# Allegro board C209.brd
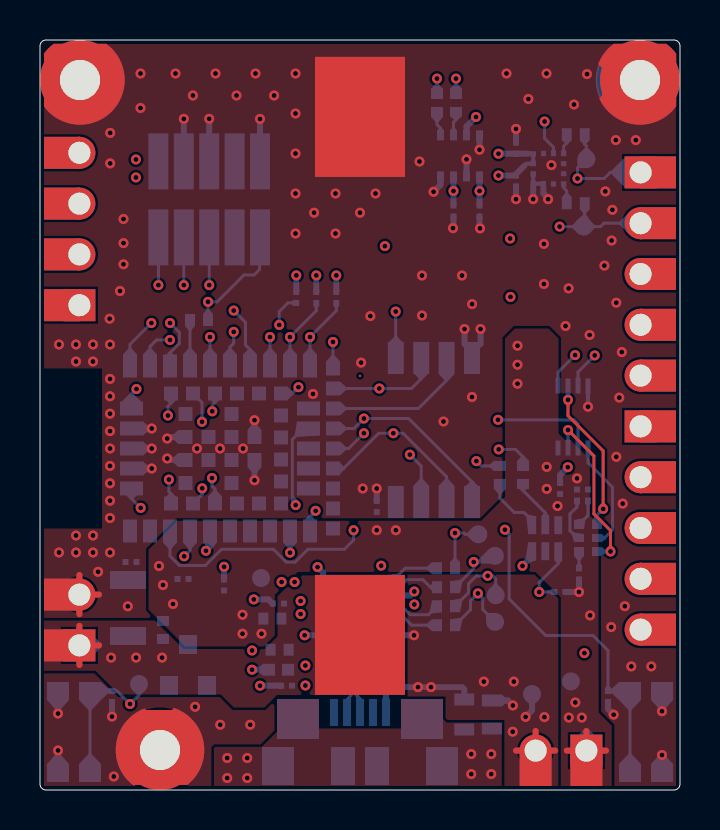
[diagram p0: board, top side]
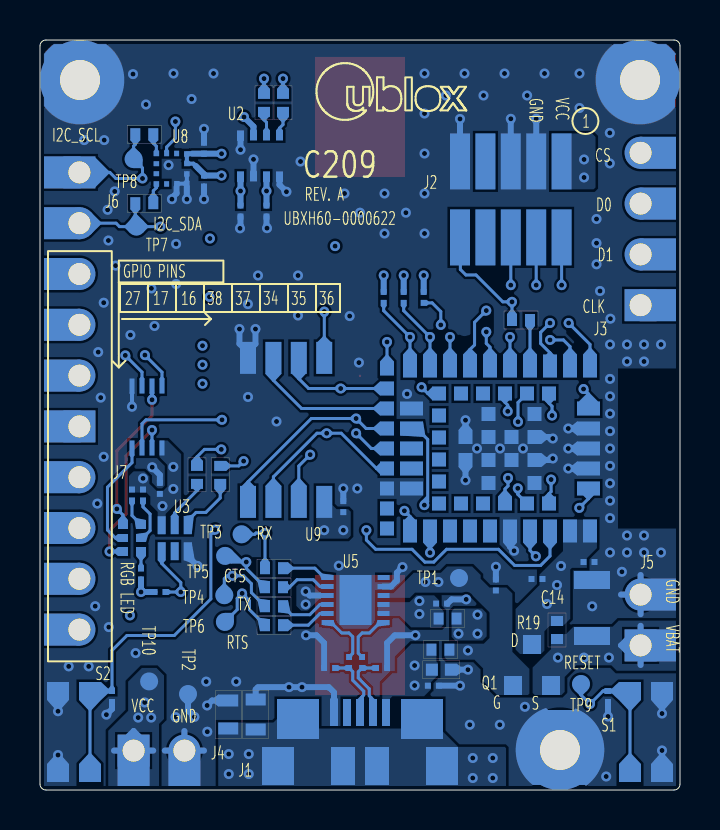
[diagram p1: board, bottom side, seen from below]

Outline 32 x 37.5 mm; copper layers: TOP, L2, L3, BOTTOM. Coordinates in mm from the lower left corner of the outline.
Outline path: 0,37.2 arc(0.09,37.41) 0.3,37.5 31.7,37.5 arc(31.91,37.41) 32,37.2 32,0.3 arc(31.91,0.09) 31.7,0 0.3,0 arc(0.09,0.09) 0,0.3 0,37.2

## Placement (name value [footprint] x y rotation side)
A1  -  [SUBLOX_NINA_LGA55_1000X1500]  15.3 12.07 180 bottom
BAT1  -  [TKEYSTONE_CR2032_3003_PLAST1]  16 20.7 90 top
C1  100N  [S0603_C]  21.21 3.77 270 bottom
C2  100N  [S0201_C]  12.33 5.21 180 bottom
C3  47P  [S0201_C]  14.92 6.1 0 bottom
C4  4U7  [S0402_C_MURATA07]  11.93 6.01 180 bottom
C5  47P  [S0201_C]  17.52 6.1 180 bottom
C6  100N  [S0201_C]  3.6 4.67 90 bottom
C7  100N  [S0201_C]  28.4 4.67 90 bottom
C8  100N  [S0201_C]  11.92 9.32 0 bottom
C9  100N  [S0201_C]  23.8 32.09 270 bottom
C10  100N  [S0201_C]  23.8 30.45 90 bottom
C11  100N  [S0201_C]  4.55 11.4 0 bottom
C12  100N  [S0201_C]  7.15 10.55 180 bottom
C13  100N  [S0201_C]  16.84 14.17 270 bottom
C14  4U7  [S1206_C]  4.4 9.1 270 bottom
C17  100N  [S0201_C]  21.97 28.95 90 bottom
C18  100N  [S0201_C]  20.68 28.95 90 bottom
C19  1U0  [S0201_C]  26 15.08 270 bottom
DS1  RGB  [S1510]  27.4 12.6 0 bottom
J1  -  [SHIROSE_ZX62R_B_5]  16 1.2 180 bottom
J2  -  [SCON_SAMTEC_50MIL_2X5]  7.82 29.53 0 bottom
J3  -  [TCONSIL100MIL4]  1.97 28.05 90 bottom
J4  -  [TCONSIL100MIL2]  26.05 1.97 180 bottom
J5  -  [TCONSIL100MIL2]  1.97 8.5 90 bottom
J6  -  [TCONSIL100MIL5]  30.03 25.8 270 bottom
J7  -  [TCONSIL100MIL5]  30.03 13.1 270 bottom
NOREF  -  []  26.9 17.1 0 top
NOREF#2  -  []  13.5 12.95 90 top
NOREF#3  -  []  12.2 -1.15 90 top
NOREF#4  -  []  26.42 30.06 90 top
NOREF#5  -  []  23.2 17.75 90 top
NOREF#6  -  []  12.75 -1.55 0 top
NOREF#7  -  []  14.55 0.15 0 top
NOREF#8  -  []  13.5 12.95 90 top
NOREF#9  -  []  14.72 8 90 top
NOREF#10  -  [unnamed#2]  6 2 0 top
NOREF#11  -  []  14.52 10.57 0 top
NOREF#12  -  [unnamed#2]  2 35.5 0 top
NOREF#13  -  []  4.57 19.07 0 top
NOREF#14  -  []  13.25 -0.25 90 top
NOREF#15  -  []  14.7 3.87 0 top
NOREF#16  -  []  15.75 0.15 0 top
NOREF#17  -  []  20.1 1.2 90 top
NOREF#18  -  []  11.75 2.55 90 top
NOREF#19  -  []  14.72 8 0 top
NOREF#20  -  []  23.2 19.85 0 top
NOREF#21  -  []  0.3 0 90 top
NOREF#22  -  []  12.7 0.15 0 top
NOREF#23  -  []  27.4 17.1 90 top
NOREF#24  -  []  15.3 12.07 90 top
NOREF#25  -  []  13.95 4.65 0 top
NOREF#26  -  []  14.72 8.43 0 top
NOREF#27  -  []  11.85 4.65 0 top
NOREF#28  -  [unnamed#2]  30 35.5 0 top
NOREF#29  -  []  11.15 5.66 0 top
NOREF#30  -  []  12.05 14.32 0 top
NOREF#31  -  []  11.83 4.46 90 top
NOREF#32  -  []  0.3 22.08 0 top
NOREF#33  -  []  17.55 0.25 90 top
NOREF#34  -  []  16.22 8.25 90 top
NOREF#35  -  []  14.5 4.65 0 top
NOREF#36  -  []  27.9 13.35 0 top
NOREF#37  -  []  11.1 5.71 90 top
NOREF#38  -  []  4.5 12.95 0 top
NOREF#39  -  []  11 0.25 90 top
NOREF#40  -  []  11.45 6.01 0 top
NOREF#41  -  []  14.92 8.25 90 top
NOREF#42  -  []  24.66 30.31 90 top
NOREF#43  -  []  12.2 -1.2 0 top
NOREF#44  -  []  7.27 16.5 0 top
NOREF#45  -  []  25.17 31.83 0 top
NOREF#46  -  []  11.83 4.46 0 top
NOREF#47  -  []  0 0.3 0 top
NOREF#48  -  []  15.04 8.38 90 top
Q1  -  [SSOT23]  7.4 6.25 180 bottom
R1  0R  [S0402_R]  11.98 7.01 180 bottom
R2  27R  [S0201_R]  15.89 6.38 90 bottom
R3  27R  [S0201_R]  16.54 6.38 90 bottom
R4  0R  [S0402_R]  11.62 8.57 180 bottom
R5  0R  [S0402_R]  20.3 11.09 0 bottom
R6  0R  [S0402_R]  20.3 9.19 0 bottom
R7  0R  [S0402_R]  20.3 10.14 0 bottom
R8  0R  [S0402_R]  20.3 8.24 0 bottom
R9  1K0  [S0201_R]  26.95 10.8 270 bottom
R10  1K0  [S0201_R]  26.85 14.75 90 bottom
R11  2K7  [S0201_R]  27.4 14.75 90 bottom
R12  0R  [S0402_R]  26.79 32.79 0 bottom
R13  0R  [S0402_R]  26.79 29.34 0 bottom
R14  0R  [S0402_R]  20.8 34.35 90 bottom
R15  0R  [S0402_R]  19.85 34.35 90 bottom
R16  0R  [S0402_R]  7.95 23.5 0 bottom
R17  10M  [S0603_R]  22.59 3.77 90 bottom
R18  10K  [S0201_R]  9.2 10.25 270 bottom
R19  0R  [S0402_R]  6.15 8 90 bottom
R20  10K  [S0201_R]  26 9.9 0 bottom
R22  0R  [S0402_R]  22.99 15.75 90 bottom
R23  0R  [S0402_R]  24.15 15.75 90 bottom
R24  4K7  [S0201_R]  14.81 24.63 90 bottom
R25  10K  [S0201_R]  12.81 24.63 270 bottom
R26  4K7  [S0201_R]  13.81 24.63 90 bottom
S1  -  [TCT_SW]  1.7 2.9 270 bottom
S2  -  [TCT_SW]  30.3 2.9 90 bottom
TP1  -  [STP_900]  11.05 10.6 180 bottom
TP2  -  [STP_900]  24.6 4.8 180 bottom
TP3  -  [STP_900]  21.92 12.79 180 bottom
TP4  -  [STP_900]  22.79 9.74 180 bottom
TP5  -  [STP_900]  22.75 11.71 180 bottom
TP6  -  [STP_900]  22.75 8.4 180 bottom
TP7  -  [STP_900]  27.18 28.17 180 bottom
TP8  -  [STP_900]  27.32 31.55 180 bottom
TP9  -  [STP_900]  4.95 5.3 180 bottom
TP10  -  [STP_900]  26.54 5.43 180 bottom
U2  -  [BME280_2500X2500_8P]  21 31.7 90 bottom
U3  -  [APDS-9306_2000X2000X700_12P]  25.26 12.59 180 bottom
U5  -  [SDFN_12_FTDI]  16.22 9.5 0 bottom
U6  -  [SVSSOP8]  26.65 18.65 270 bottom
U8  -  [ST_LGA_2000X2000X700_12P]  25.42 31.06 180 bottom
U9  -  [SSOIC8_S2A]  19.7 18 270 bottom

## Library data of the parts
A1 = UBLOX_NINA_B3: part number: UBLOX_NINA_B3_DEFAULT-UBXH14-0000403
BAT1 = BATTERY_SMD1
C1 = CAP: User Part Number: S0603_C; part number: CAP_DEFAULT-UBXH01-2022001
C2 C6-C13 C17 C18 = CAP: User Part Number: S0402_C; part number: CAP_DEFAULT-UBXH01-0000245
C3 C5 = CAP: User Part Number: S0402_C; part number: CAP_DEFAULT-UBXH01-0001022
C4 = CAP: part number: CAP_DEFAULT-UBXH01-0000243
C14 = CAP: User Part Number: S1206_C; part number: CAP_DEFAULT-UBXH01-0000127
C19 = CAP: User Part Number: S0402_C; part number: CAP_DEFAULT-UBXH01-0000272
DS1 = SMLP36: part number: SMLP36_DEFAULT-UBXH11-0000019
J1 = CON_005: part number: CON_005_ADD6SGND-UBXH04-0000168
J2 = CON_010: User Part Number: TCONDIL100MIL72; part number: CON_010_DEFAULT-UBXH04-0000194
J3 = CON_004: part number: CON_004_DEFAULT-UBXH04-0000590
J4 J5 = CON_002: part number: CON_002_DEFAULT-UBXH04-0000587
J6 J7 = CON_005: part number: CON_005_DEFAULT-UBXH04-0005001
Q1 = P_CHANNEL_MOSFET: User Part Number: SSOT23; part number: P_CHANNEL_MOSFET_SOT23-UBXH20-0071001
R1 R4-R8 R12-R16 R19 R22 R23 = RES: User Part Number: S0402_R; part number: RES_DEFAULT-UBXH18-0003002
R2 R3 = RES: User Part Number: S0201_R; part number: RES_DEFAULT-UBXH18-0000470
R9 R10 = RES: User Part Number: S0201_R; part number: RES_DEFAULT-UBXH18-0000007
R11 = RES: User Part Number: S0201_R; part number: RES_DEFAULT-UBXH18-0000027
R17 = RES: User Part Number: S0603_R; part number: RES_DEFAULT-UBXH18-0007169
R18 R20 R25 = RES: User Part Number: S0201_R; part number: RES_DEFAULT-UBXH18-0001097
R24 R26 = RES: User Part Number: S0201_R; part number: RES_DEFAULT-UBXH18-0001089
S1 S2 = SW_ON_1POLA
TP1-TP10 = TESTPOINT: part number: TESTPOINT_DEFAULT-UBXH00-0000021
U2 = BME_280
U3 = APDS-9306
U5 = FTDI_FT234XD
U6 = NXP_74LVC3G07
U8 = ST_LGA
U9 = FLASH_SQI: part number: FLASH_SQI_SOIC8-UBXH13-0000073

## Footprints (pads in the part's own frame, mm; a bottom-side part is the same pattern mirrored in y, then rotated)
APDS-9306_2000X2000X700_12P
  rect 0.4x0.9 smd: 1(0.65,0.65) 2(0,0.65) 3(-0.65,0.65) 4(-0.65,-0.65) 5(0,-0.65) 6(0.65,-0.65)
BME280_2500X2500_8P
  rect 0.5x0.35 smd: 1(1.025,0.975) 2(1.025,0.325) 3(1.025,-0.325) 4(1.025,-0.975) 5(-1.025,-0.975) 6(-1.025,-0.325) 7(-1.025,0.325) 8(-1.025,0.975)
S0201_C
  rect 0.3x0.3 smd: 1(-0.275,0) 2(0.275,0)
S0201_R
  rect 0.3x0.3 smd: 1(-0.275,0) 2(0.275,0)
S0402_C_MURATA07
  rect 0.6x0.6 smd: 1(-0.475,0) 2(0.475,0)
S0402_R
  rect 0.5x0.6 smd: 1(-0.45,0) 2(0.45,0)
S0603_C
  rect 0.6x1 smd: 1(-0.75,0) 2(0.75,0)
S0603_R
  rect 0.6x1 smd: 1(-0.7,0) 2(0.7,0)
S1206_C
  rect 0.9x1.8 smd: 1(-1.4,0) 2(1.4,0)
S1510
  rect 0.5x0.45 smd: 1(-0.45,0.675) 3(-0.45,-0.675) 4(0.45,-0.675) 6(0.45,0.675)
  rect 0.5x0.4 smd: 2(-0.45,0) 5(0.45,0)
SCON_SAMTEC_50MIL_2X5
  rect 1x2.8 smd: 1(-1.905,-1.9) 2(-1.905,1.9) 3(-0.635,-1.9) 4(-0.635,1.9) 5(0.635,-1.9) 6(0.635,1.9) 7(1.905,-1.9) 8(1.905,1.9) 9(3.175,-1.9) 10(3.175,1.9)
SDFN_12_FTDI
  rect 0.6x0.25 smd: 1(-1.4,1.125) 2(-1.4,0.675) 3(-1.4,0.225) 4(-1.4,-0.225) 5(-1.4,-0.675) 6(-1.4,-1.125) 7(1.4,-1.125) 8(1.4,-0.675) 9(1.4,-0.225) 10(1.4,0.225) 11(1.4,0.675) 12(1.4,1.125)
  rect 1.6x2.5 smd: 13(0,0)
SHIROSE_ZX62R_B_5
  rect 0.4x1.35 smd: 1(1.3,2.675) 2(0.65,2.675) 3(0,2.675) 4(-0.65,2.675) 5(-1.3,2.675)
  rect 2.1x2 smd: 6(-3.1,2.35) 11(3.1,2.35)
  rect 1.6x1.9 smd: 7(-4.1,0) 10(4.1,0)
  rect 1.2x1.9 smd: 8(-0.85,0) 9(0.85,0)
SSOIC8_S2A
  rect 1.6x0.8 smd: 1(-3.6,1.905) 2(-3.6,0.635) 3(-3.6,-0.635) 4(-3.6,-1.905) 5(3.6,-1.905) 6(3.6,-0.635) 7(3.6,0.635) 8(3.6,1.905)
SSOT23
  rect 0.9x0.95 smd: 1(-0.95,-1.025) 2(0.95,-1.025) 3(0,1.025)
ST_LGA_2000X2000X700_12P
  rect 0.275x0.25 smd: 1(-0.762,0.75) 2(-0.762,0.25) 3(-0.762,-0.25) 4(-0.762,-0.75) 7(0.762,-0.75) 8(0.762,-0.25) 9(0.762,0.25) 10(0.762,0.75)
  rect 0.25x0.275 smd: 5(-0.25,-0.762) 6(0.25,-0.75) 11(0.25,0.761) 12(-0.25,0.761)
STP_900
  round 0.9 smd: 1(0,0)
SUBLOX_NINA_LGA55_1000X1500
  rect 0.7x1.15 smd: 1(1.8,0.875) 2(2.8,0.875) 3(3.8,0.875) 4(4.8,0.875) 5(5.8,0.875) 6(6.8,0.875) 7(7.8,0.875) 8(8.8,0.875) 9(9.8,0.875) 10(10.8,0.875) 16(10.8,9.125) 17(9.8,9.125) 18(8.8,9.125) 19(7.8,9.125) 20(6.8,9.125) 21(5.8,9.125) 22(4.8,9.125) 23(3.8,9.125) 24(2.8,9.125) 25(1.8,9.125)
  rect 1.15x0.7 smd: 11(10.725,3) 12(10.725,4) 13(10.725,5) 14(10.725,6) 15(10.725,7) 26(1.875,7) 27(1.875,6) 28(1.875,5) 29(1.875,4) 30(1.875,3)
  rect 0.7x0.7 smd: 31(3.25,2.25) 32(4.35,2.25) 33(5.45,2.25) 34(6.55,2.25) 35(7.65,2.25) 36(8.75,2.25) 37(8.75,7.75) 38(7.65,7.75) 39(6.55,7.75) 40(5.45,7.75) 41(4.35,7.75) 42(3.25,7.75) 43(3.25,6.65) 44(3.25,5.55) 45(3.25,4.45) 46(3.25,3.35) 47(0.65,9) 48(0.65,8) 49(0.65,7) 50(0.65,6) 51(0.65,5) 52(0.65,4) 53(0.65,3) 54(0.65,2) 55(0.65,1) 56(4.575,4.425) 57(4.575,5.575) 58(5.725,3.275) 59(5.725,4.425) 60(5.725,5.575) 61(5.725,6.725) 62(6.875,4.425) 63(6.875,5.575) 64(8.025,3.275) 65(8.025,4.425) 66(8.025,5.575) 67(8.025,6.725)
SVSSOP8
  rect 0.75x0.25 smd: 1(-1.55,0.75) 2(-1.55,0.25) 3(-1.55,-0.25) 4(-1.55,-0.75) 5(1.55,-0.75) 6(1.55,-0.25) 7(1.55,0.25) 8(1.55,0.75)
TCONSIL100MIL2
  rect 1.6x1.6 hole 1.1: 1(-1.27,0)
  round 1.6 hole 1.1: 2(1.27,0)
TCONSIL100MIL4
  rect 1.6x1.6 hole 1.1: 1(-3.81,0)
  round 1.6 hole 1.1: 2(-1.27,0) 3(1.27,0) 4(3.81,0)
TCONSIL100MIL5
  rect 1.6x1.6 hole 1.1: 1(-5.08,0)
  round 1.6 hole 1.1: 2(-2.54,0) 3(0,0) 4(2.54,0) 5(5.08,0)
TCT_SW
  rect 0.9x1.1 smd: 1(-2.05,0.8) 2(2.05,0.8) 3(-2.05,-0.8) 4(2.05,-0.8)
TKEYSTONE_CR2032_3003_PLAST1
  round 0.115 smd: NEG(0,0)
  rect 6x4.5 smd: POS1(-12.95,0) POS2(12.95,0)
unnamed#2
  round 4 hole 2: (0,0)

## Nets
GND: A1.6(GND_6) A1.12(GND_12) A1.13(ANT) A1.14(GND_14) A1.26(GND_26) A1.30(GND_30) A1.53(GND_53) A1.56 A1.57 A1.58 A1.59 A1.60 A1.61 A1.62 A1.63 A1.64 A1.65 A1.66 A1.67 BAT1.POS2(B) C1.1(A<0>) C2.2(B<0>) C3.1(A<0>) C4.2(B<0>) C5.1(A<0>) C6.1(A<0>) C7.1(A<0>) C8.1(A<0>) C9.1(A<0>) C10.1(A<0>) C11.1(A<0>) C12.1(A<0>) C13.1(A<0>) C14.1(A<0>) C17.1(A<0>) C18.1(A<0>) C19.1(A<0>) J1.5 J2.3(C) J2.5(E) J2.9(I) J4.2(B) J5.2(B) R17.2(B<0>) R18.1(A<0>) S1.1(A1) S1.2(A2) S2.1(A1) S2.2(A2) TP2.1(D) U2.1 U2.5(SDO) U2.7 U3.6 U5.5 U5.13 U6.4 U8.6 U8.7(RES) U8.8 U9.4(GND)
GNDA: C1.2(B<0>) J1.6 J1.7 J1.8 J1.9 J1.10 J1.11 R17.1(A<0>)
VBAT: BAT1.POS1(A) C14.2(B<0>) J5.1(A) Q1.2(S) R19.1(A<0>)
VBUS: C2.1(A<0>) C4.1(A<0>) J1.1 R1.1(A<0>)
VBUS1: Q1.1(G) R1.2(B<0>) R18.2(B<0>) TP1.1(D) U5.4(VCC)
VCC: A1.9(VCC_IO) A1.10(VCC) C9.2(B<0>) C10.2(B<0>) C11.2(B<0>) C12.2(B<0>) C13.2(B<0>) C17.2(B<0>) C18.2(B<0>) C19.2(B<0>) J2.1(A) J4.1(A) Q1.3(D) R4.2(B<0>) R9.2(B<0>) R10.2(B<0>) R11.2(B<0>) R19.2(B<0>) R20.2(B<0>) R24.2(B<0>) R25.1(A<0>) R26.2(B<0>) TP10.1(D) U2.2(CSB) U2.6(VDDIO) U2.8(VDD) U3.3(VDD) U6.8 U8.9(VDD) U8.10(VDDIO) U9.8(VDD)
ALS_INT: A1.2(GPIO_2) R20.1(A<0>) U3.4(INT)
FTDI_DM: R2.2(B<0>) U5.1(USBDM)
FTDI_DP: R3.2(B<0>) U5.12(USBDP)
FTDI_VCC: C8.2(B<0>) R4.1(A<0>) U5.2(RESET#) U5.3(3V3OUT) U5.9(VCCIO)
GPIO_16: A1.16(GPIO_16) J6.5(E)
GPIO_17: A1.17(GPIO_17) J6.4(D)
GPIO_27: A1.27(GPIO_27) J6.3(C)
GPIO_34: A1.34(GPIO_34) J7.3(C)
GPIO_35: A1.35(GPIO_35) J7.4(D)
GPIO_36: A1.36(GPIO_36) J7.5(E)
GPIO_37: A1.37(GPIO_37) J7.2(B)
GPIO_38: A1.38(GPIO_38) J7.1(A)
GPIO_47_D3: A1.47(GPIO_47) U9.7(SIO3)
GPIO_48_D1: A1.48(GPIO_48) J3.2(B) U9.2(SIO1)
GPIO_49_D2: A1.49(GPIO_49) U9.3(SIO2)
GPIO_50_D0: A1.50(GPIO_50) J3.3(C) U9.5(SIO0)
GPIO_51_CS: A1.51(GPIO_51) J3.4(D) U9.1(CE*)
GPIO_52_CLK: A1.52(GPIO_52) J3.1(A) U9.6(SCK)
I2C_SCL: A1.24(GPIO_24) J6.1(A) R12.2(B<0>) R15.2(B<0>) R22.2(B<0>) R26.1(A<0>) TP8.1(D)
I2C_SDA: A1.25(GPIO_25) J6.2(B) R13.2(B<0>) R14.2(B<0>) R23.2(B<0>) R24.1(A<0>) TP7.1(D)
LIS_INT: A1.42(GPIO_42) R25.2(B<0>) U8.12(INT1)
NINA_BLUE: A1.8(GPIO_8) U6.1(1A)
NINA_GREEN: A1.7(GPIO_7) J2.6(F) U6.6(3A)
NINA_RED: A1.1(GPIO_1) U6.3(2A)
NINA_SW2: A1.18(GPIO_18) C7.2(B<0>) S2.3(B1) S2.4(B2)
NINA_SWCLK: A1.11(SWDCLK) J2.4(D)
NINA_SWDIO: A1.15(SWDIO) J2.2(B)
RESET_N: C6.2(B<0>) J2.10(K) R16.2(B<0>) S1.3(B1) S1.4(B2) TP9.1(D)
UART_CTS: A1.21(GPIO_21) R7.2(B<0>) TP5.1(D)
UART_RTS: A1.20(GPIO_20) R8.2(B<0>) TP6.1(D)
UART_RX: A1.23(GPIO_23) R5.2(B<0>) TP3.1(D)
UART_TX: A1.22(GPIO_22) R6.2(B<0>) TP4.1(D)
UNNAMED_1_APDS-9306_I175_SCL: R22.1(A<0>) U3.1(SCL)
UNNAMED_1_APDS-9306_I175_SDA: R23.1(A<0>) U3.2(SDA)
UNNAMED_1_BME280_I174_SCK: R15.1(A<0>) U2.4(SCK)
UNNAMED_1_BME280_I174_SDI: R14.1(A<0>) U2.3(SDI)
UNNAMED_1_FTDIFT234XD_I2_CTS: R8.1(A<0>) U5.11(CTS#)
UNNAMED_1_FTDIFT234XD_I2_RTS: R7.1(A<0>) U5.8(RTS#)
UNNAMED_1_FTDIFT234XD_I2_RXD: R6.1(A<0>) U5.10(RXD)
UNNAMED_1_FTDIFT234XD_I2_TXD: R5.1(A<0>) U5.7(TXD)
UNNAMED_1_NXP74LVC3G07_I5_1Y: DS1.6(CAB) U6.7(1Y)
UNNAMED_1_NXP74LVC3G07_I5_2Y: DS1.5(CAR) U6.5(2Y)
UNNAMED_1_NXP74LVC3G07_I5_3Y: DS1.4(CAG) U6.2(3Y)
UNNAMED_1_RES_I28_A: DS1.1(ANB) R9.1(A<0>)
UNNAMED_1_RES_I29_A: DS1.2(ANR) R10.1(A<0>)
UNNAMED_1_RES_I30_A: DS1.3(ANG) R11.1(A<0>)
UNNAMED_1_RES_I33_A: R13.1(A<0>) U8.4(SDA/SDI/SDO)
UNNAMED_1_RES_I34_A: R12.1(A<0>) U8.1(SCL/SPC)
UNNAMED_1_RES_I81_A: A1.19(RESET*) R16.1(A<0>)
USB_DM: C3.2(B<0>) J1.2 R2.1(A<0>)
USB_DP: C5.2(B<0>) J1.3 R3.1(A<0>)

Pads without a net: A1 3 4 5 28 29 31 32 33 39 40 41 43 44 45 46 54 55; BAT1 NEG; J1 4; J2 7 8; U3 5; U5 6; U8 2 3 5 11

## Via types
v1: diameter 0.5, hole 0.25, TOP to BOTTOM, 250 vias

## Routing (per net, layer and track width the routed paths; a pad name or vN(x,y) marks a point on that pad's centre or on a via; arc(x,y) is an arc through that point)
GND: length 79.7
  TOP w0.3: J5.2 2.95,9.77 ; J5.2 1.97,8.79 ; J5.2 1.97,10.75 ; J4.2 24.78,2.95 ; J4.2 25.76,1.97 ; J4.2 23.8,1.97
  L2 w0.3: J5.2 2.95,9.77 ; J5.2 0.99,9.77 ; J5.2 1.97,10.75 ; J5.2 1.97,8.79 ; 24.78,0.99 J4.2 ; J4.2 23.8,1.97 ; J4.2 24.78,2.95 ; J4.2 25.76,1.97
  L3 w0.3: 24.78,0.99 J4.2 ; J4.2 24.78,2.95 ; J4.2 23.8,1.97 ; J4.2 25.76,1.97 ; 0.99,9.77 J5.2 ; J5.2 2.95,9.77 ; J5.2 1.97,10.75 ; J5.2 1.97,8.79
  BOTTOM w0.2: U8.7 U8.6 25.17,30.15 25.17,30.15 ; U8.7 U8.8 ; U8.7 24.66,30.15 24.66,30.15 ; U6.4 v1(27.4,19.16)
  BOTTOM w0.3: A1.6 8.5,12.16 v1(8.3,11.96) ; v1(18.7,7.74) 18.17,7.74 17.79,7.36 C5.1 ; U3.6 24.61,11.7 v1(24.12,11.21) ; C10.1 v1(23.8,29.54) ; J4.2 25.76,1.97 ; J4.2 23.8,1.97 ; J4.2 24.78,2.95 ; C19.1 26,15.75 v1(26.39,16.14) ; A1.66 6.44,17.65 v1(6.36,17.57) ; 25.17,30.15 25.17,29.83 25.4,29.6 v1(25.4,29.54) ; v1(6.36,16.57) 6.44,16.5 A1.65 ; C13.1 v1(16.84,15.07) ; v1(13.88,11.15) 14.15,10.87 14.15,10.47 14.45,10.18 U5.5 ; 10.72,16.5 v1(10.72,15.49) ; J2.5 v1(8.46,33.56) ; v1(20.65,28.09) 20.68,28.12 C18.1 ; S2.2 v1(31.1,3.94) ; A1.13 v1(5.59,17.07) ; 21.6,21.89 22.03,22.31 v1(22.03,23.05) ; 21.6,21.89 21.6,21.93 21.23,22.3 v1(21.23,23.05) ; 21.6,21.89 U9.4 ; C7.1 28.4,4.05 v1(28.68,3.77) ; 21.13,5.11 21.21,5.03 C1.1 ; v1(24.66,29.54) 24.66,29.57 24.66,29.57 24.66,30.15 ; U2.5 20.02,30.26 v1(19.68,29.91) ; 21.1,5.14 v1(19.55,5.14) v1(18.9,5.14) 17.56,5.14 17.3,4.88 J1.5 ; C8.1 11.63,9.32 11.42,9.53 v1(10.69,9.53) ; C3.1 14.64,7.35 14.26,7.74 v1(13.23,7.74) ; v1(22,28.08) 21.97,28.11 C17.1 ; J2.9 v1(11,33.55) ; TP2.1 24.6,3.98 v1(24.28,3.66) ; 9.2,10.52 v1(9.2,11.16) ; 10.72,17.65 v1(10.72,18.49) ; C2.2 v1(11,5.21) ; A1.12 v1(5.59,16.07) ; R17.2 23.4,4.47 v1(23.64,4.23) ; S1.2 v1(0.9,1.98) ; C6.1 v1(3.6,3.67) ; C4.2 v1(10.6,6.01) ; S1.1 v1(0.9,3.82) ; J5.2 2.95,9.77 ; J5.2 1.97,10.75 ; J5.2 1.97,8.79 ; U2.7 v1(21.32,31.53) ; C9.1 v1(23.8,33.06) ; S2.1 v1(31.1,1.75) ; A1.14 v1(5.59,18.07) ; J2.3 v1(7.19,33.56) ; U2.1 v1(21.97,32.01)
  vias: v1(0.95,22.27) v1(0.95,11.88) v1(1.8,22.27) v1(1.8,21.42) v1(1.8,12.72) v1(1.8,11.88) v1(2.65,22.27) v1(2.65,21.42) v1(2.65,12.72) v1(2.65,11.88) v1(2.9,10.91) v1(3.51,32.85) v1(3.51,31.33) v1(3.48,23.56) v1(3.5,22.27) v1(3.5,20.55) v1(3.5,19.69) v1(3.5,18.81) v1(3.5,17.95) v1(3.5,17.07) v1(3.5,16.2) v1(3.5,15.33) v1(3.5,14.46) v1(3.5,13.59) v1(3.5,11.88) v1(3.69,0.67) v1(4,24.95) v1(4.17,28.55) v1(4.17,27.34) v1(4.17,26.28) v1(4.39,9.18) v1(5.02,35.83) v1(5.02,34.1) v1(6.77,35.83) v1(7.64,34.73) v1(7.85,17.07) v1(7.75,4.16) v1(8.77,35.83) v1(9,17.07) v1(9.01,3.26) v1(9.82,34.73) v1(10.15,17.07) v1(10.51,3.26) v1(10.77,35.83) v1(11.7,34.73) v1(12.77,35.83) v1(12.77,33.83) v1(12.77,31.83) v1(12.77,29.83) v1(12.77,27.83) v1(13.65,19.8) v1(13.7,28.87) v1(14.77,29.83) v1(14.77,27.83) v1(16,28.87) v1(16.05,21.37) v1(16.13,15.07) v1(16.52,23.7) v1(16.77,29.83) v1(17.06,11.21) v1(18.97,31.42) v1(19.1,25.73) v1(19.1,23.73) v1(20.18,18.42) v1(21.1,25.73) v1(21.61,24.3) v1(21.6,19.65) v1(22.19,5.42) v1(23.32,35.83) v1(23.64,2.91) v1(23.69,5.42) v1(24.42,34.55) v1(25.19,27.3) v1(25.19,25.3) v1(25.22,3.64) v1(25.32,35.83) v1(25.57,31.24) v1(26.28,23.2) v1(26.43,25.08) v1(26.7,34.27) v1(27.22,6.84) v1(27.35,35.8) v1(27.48,22.75) v1(28.22,26.22) v1(28.26,29.93) v1(28.62,29.01) v1(28.58,27.48) v1(28.56,8.14) v1(28.79,32.49) v1(28.82,24.37) v1(28.82,16.66) v1(28.96,19.62) v1(29.09,21.9) v1(29.14,14.32) v1(29.24,9.19) v1(29.57,6.18) v1(29.79,32.49) v1(30.57,6.18)
GNDA:
  vias: v1(9.36,1.6) v1(9.36,0.6) v1(10.36,1.6) v1(10.36,0.6) v1(21.56,1.8) v1(21.56,0.8) v1(22.56,1.8) v1(22.56,0.8)
VBAT: length 9.6
  TOP w0.3: 1.97,6.25 J5.1 ; J5.1 1.97,8.21 ; J5.1 2.95,7.23
  L2 w0.3: J5.1 2.9,7.23 ; J5.1 1.97,6.3 ; J5.1 1.97,8.16 ; J5.1 1.04,7.23
  BOTTOM w0.3: 2.95,7.23 J5.1 ; J5.1 1.97,6.25 ; J5.1 1.97,8.21
  vias: v1(3.55,6.62) v1(4.8,6.62) v1(6.11,6.62)
VBUS:
  vias: v1(13.27,6.22) v1(13.27,5.22)
VBUS1:
  vias: v1(10.61,6.97) v1(12.08,10.4) v1(12.73,10.4)
VCC: length 21.6
  TOP w0.3: 26.34,1.97 J4.1 ; J4.1 27.32,2.95 ; J4.1 28.3,1.97
  L2 w0.3: 27.32,1.04 J4.1 ; J4.1 26.39,1.97 ; J4.1 28.25,1.97 ; J4.1 27.32,2.9
  BOTTOM w0.2: 24.21,31.2 24.32,31.31 U8.9 U8.10 24.4,31.81
  BOTTOM w0.3: C17.2 v1(21.97,29.95) U2.8 ; R24.2 v1(14.81,25.73) ; 26.34,1.97 J4.1 ; J4.1 28.3,1.97 ; J4.1 27.32,2.95 ; U2.2 21.32,33.17 v1(21.8,33.65) ; 24.4,31.81 C9.2 v1(22.92,31.81) ; C18.2 v1(20.68,29.95) 20.68,30.68 ; R9.2 v1(26.95,9.9) 26.28,9.9 ; v1(22.92,30.72) 23.02,30.72 C10.2 23.8,30.79 24.21,31.2 ; R25.1 v1(12.81,25.73) ; R26.2 v1(13.81,25.73)
  vias: v1(4.8,31.53) v1(4.8,30.63) v1(5.95,11.2) v1(6.15,10.25) v1(6.65,9.3) v1(10.12,8.77) v1(10.12,7.81) v1(11.07,7.81) v1(16.84,12.99) v1(17.25,27.2) v1(17.79,12.99) v1(23.5,27.58) v1(23.53,24.66) v1(23.87,22.21) v1(23.87,21.27) v1(23.87,20.31) v1(25.33,16.16) v1(25.33,15.05) v1(25.88,14.2) v1(26.44,3.62) v1(26.85,15.58) v1(26.77,4.38) v1(27.09,3.62) v1(27.5,8.73)
ALS_INT: length 18.6
  L2 w0.15: v1(12.5,11.86) 13.06,11.86 13.25,11.68 18.5,11.68 21.49,8.68 23.74,8.68 v1(24.96,9.9)
  BOTTOM w0.15: R20.1 v1(24.96,9.9) 24.96,10.37 25.92,11.33 25.92,11.94 ; A1.2 v1(12.5,11.86)
FTDI_DM: length 2.7
  BOTTOM w0.15: R2.2 16.09,6.84 16.09,7.65 15.89,7.85 15.53,7.85 15,8.38 U5.1
FTDI_DP: length 2.6
  BOTTOM w0.15: R3.2 16.37,6.83 16.37,7.66 16.55,7.85 16.92,7.85 17.44,8.38 U5.12
FTDI_VCC: length 1.2
  BOTTOM w0.2: U5.9 18,9.72
  BOTTOM w0.3: 18,9.72 18.51,9.72 v1(18.72,9.93)
  vias: v1(13.03,9.45) v1(13.03,8.8) v1(18.72,9.28)
GPIO_16: length 46.7
  L2 w0.15: J6.5 28.8,20.72 28.36,20.28 28.36,18.53 27.86,18.02 27.86,14.95 27.07,14.17 27.07,11.58 25.89,10.39 25.89,9.67 24.33,8.11 21.25,8.11 18.97,10.39 13.41,10.39 12.88,10.91 12.34,10.91 11.23,12.02 11.23,16.64 9.26,18.62 9.26,19 5.57,22.69 v1(5.57,23.35)
  BOTTOM w0.15: v1(5.57,23.35) 4.5,22.28 A1.16
GPIO_17: length 46.7
  L2 w0.15: J6.4 28.85,23.26 28.57,22.98 28.57,21.26 27.98,20.67 27.98,18.71 27.54,18.27 27.54,15.1 26.77,14.33 26.77,11.77 25.57,10.57 25.57,9.8 24.16,8.39 21.38,8.39 19.1,10.68 13.57,10.68 13.05,11.19 12.51,11.19 11.54,12.16 11.54,16.79 9.66,18.67 9.66,19.3 6.5,22.47 v1(6.5,22.5)
  BOTTOM w0.15: v1(6.5,22.5) 5.83,22.5 5.5,22.17 A1.17
GPIO_27: length 38
  L2 w0.15: J6.3 28.72,25.8 28.21,25.3 28.21,21.42 26.85,20.05 26.85,17.76 25.83,16.74 25.83,15.22 26.44,14.62 26.44,12.04 23.39,8.99 21.57,8.99 18.59,11.97 15.05,11.97 v1(12.78,14.24)
  BOTTOM w0.15: v1(12.78,14.24) 12.62,14.41 12.62,17.53 13.16,18.07 A1.27
GPIO_34: length 32.3
  L2 w0.15: J7.3 29.12,12.19 29.12,11.8 28.12,10.81 28.12,10.01 26.72,8.6 26.71,8.6 26.45,8.34 26.45,8.33 25.08,6.97 12.61,6.97 11.42,8.15 11.42,9.47 10.3,10.59 10.3,13.9 v1(8.6,15.6)
  BOTTOM w0.15: v1(8.6,15.6) 8.6,15.2 8.75,15.05 8.75,14.32
GPIO_35: length 31.4
  L2 w0.15: J7.4 29.03,10.56 28.71,10.25 28.71,9.24 26.15,6.68 12.28,6.68 12.01,6.95 11.3,6.95 10.62,7.63 10.62,8.91 9.66,9.87 9.66,13.54 v1(8.11,15.08)
  BOTTOM w0.15: v1(8.11,15.08) 8.11,14.79 7.65,14.32
GPIO_36: length 32.7
  L2 w0.15: v1(6.45,15.52) 8.75,13.22 8.75,8.19 10.47,6.47 11.86,6.47 12.56,5.77 13.59,5.77 14.19,6.37 28.38,6.37 J7.5
  BOTTOM w0.15: v1(6.45,15.52) 6.45,14.92 6.55,14.81 6.55,14.32
GPIO_37: length 39.1
  L2 w0.15: J7.2 28.88,15.64 28.63,15.39 28.63,13.67 27.78,12.82 27.78,10.07 24.97,7.26 12.93,7.26 11.7,8.5 11.7,9.62 10.62,10.7 10.62,14.28 8.57,16.33 7.57,16.33 7.25,16.64 7.25,17.87 v1(6.4,18.72)
  BOTTOM w0.15: 6.55,19.82 6.55,19.34 6.4,19.19 v1(6.4,18.72)
GPIO_38: length 39.2
  L2 w0.15: J7.1 28.63,18.18 28.19,17.74 28.19,14.78 27.43,14.01 27.43,11.4 26.2,10.18 26.2,9.47 24.55,7.82 21.05,7.82 20.66,8.2 12.62,8.2 12.3,8.53 12.3,9.46 10.91,10.84 10.91,14.51 8.44,16.98 8.44,18.07 v1(8.1,18.41)
  BOTTOM w0.15: 7.65,19.82 8.1,19.38 v1(8.1,18.41)
GPIO_47_D3: length 12.6
  L2 w0.15: v1(18.49,16.77) 18.22,17.04 15.7,17.04 15.19,17.55 15.19,21.86 v1(14.65,22.4)
  BOTTOM w0.15: v1(14.65,22.4) A1.47 ; v1(18.49,16.77) 19.06,16.2 U9.7
GPIO_48_D1: length 24.2
  L2 w0.15: J3.2 9.15,26.78 11.51,24.41 13.89,24.41 16.97,21.34 v1(16.97,20.07)
  BOTTOM w0.15: A1.48 v1(16.97,20.07) 18.57,20.07 19.05,20.56 19.05,21.59 U9.2
GPIO_49_D2: length 7.4
  BOTTOM w0.15: A1.49 18.92,19.07 20.33,20.49 U9.3
GPIO_50_D0: length 31.7
  L2 w0.15: J3.3 3.36,27.93 8.5,27.93 11.72,24.7 14.05,24.7 17.47,21.28 17.47,19.62 16.75,18.89 16.52,18.89 v1(16.2,18.57)
  BOTTOM w0.15: A1.50 15.7,18.07 v1(16.2,18.57) 18.43,18.57 21.6,15.41 U9.5
GPIO_51_CS: length 30.7
  L2 w0.15: v1(16.2,17.84) 16.65,17.84 18.26,19.44 18.26,23.45 v1(17.79,23.92) 16.72,24.99 11.97,24.99 8.76,28.2 8.75,28.2 8.67,28.28 5.55,28.28 J3.4
  BOTTOM w0.15: v1(17.79,23.92) 17.79,22.63 17.79,22.63 U9.1 ; A1.51 15.43,17.07 v1(16.2,17.84)
GPIO_52_CLK: length 31.2
  L2 w0.15: J3.1 3.42,25.7 9.74,25.7 11.34,24.1 13.67,24.1 15.48,22.29 15.48,17.71 15.87,17.32 17.15,17.32 v1(17.67,17.84)
  BOTTOM w0.15: A1.52 15.17,16.07 16.94,17.84 v1(17.67,17.84) 18.15,17.84 20.33,15.66 U9.6
I2C_SCL: length 53
  L2 w0.15: v1(19.85,35.57) 20.38,36.1 21.87,36.1 26.87,31.1 v1(26.87,30.58) 26.87,29.68 26.99,29.56 26.99,24.73 25.12,22.85 25.12,18.43 23.13,16.45 v1(21.82,16.45) 20.95,16.45 20.2,15.69 17.81,15.69 17.42,16.08 15.43,16.08 14.22,17.29 14.22,20.93 v1(12.5,22.65)
  BOTTOM w0.15: v1(21.82,16.45) 22.06,16.2 R22.2 ; R12.2 27.23,32.28 27.32,32.2 TP8.1 26.87,31.1 v1(26.87,30.58) 28.21,30.58 28.51,30.88 J6.1 ; A1.24 v1(12.5,22.65) 13.81,23.96 R26.1 ; R15.2 v1(19.85,35.57)
I2C_SDA: length 49.3
  L2 w0.15: v1(20.8,35.57) 21.86,35.57 22.82,34.6 22.82,33.13 25.98,29.98 v1(25.98,28.17) 25.98,26.46 25.85,26.33 25.85,24.26 24.8,23.22 24.8,18.9 v1(22.93,17.03) 21.06,17.03 20.02,15.99 18,15.99 17.64,16.36 15.54,16.36 14.53,17.37 14.53,21.22 13.5,22.25 v1(13.5,22.65)
  BOTTOM w0.15: R23.2 24.15,16.66 23.78,17.03 v1(22.93,17.03) ; J6.2 28.2,28.34 28.03,28.17 TP7.1 ; R13.2 27.23,28.23 TP7.1 ; A1.25 v1(13.5,22.65) 14.81,23.96 R24.1 ; TP7.1 v1(25.98,28.17) ; R14.2 v1(20.8,35.57)
LIS_INT: length 41.7
  L2 w0.15: v1(11.96,23.25) 11.96,21.1 v1(12.92,20.14) 12.92,18.17 15.3,15.8 17.12,15.8 17.54,15.37 20.36,15.37 20.97,15.97 23.19,15.97 25.39,18.17 25.39,21.52 27.33,23.46 27.33,31.32 v1(25.23,33.42)
  BOTTOM w0.15: U8.12 25.67,32.15 25.23,32.59 v1(25.23,33.42) ; v1(12.92,20.14) 12.61,19.82 A1.42 ; v1(11.96,23.25) 11.96,23.92 12.39,24.35 R25.2
Net_3: length 0.9
  BOTTOM w0.15: v1(8.61,18.93) 8.61,19.24 8.75,19.38 8.75,19.82
NINA_BLUE: length 36.9
  L2 w0.15: v1(15.68,12.99) 16.13,13.44 18.3,13.44 21.32,10.42 22.03,10.42 22.23,10.22 23.8,10.22 25.02,11.44 25.02,14.15 24.53,14.65 24.53,16.78 25.67,17.93 25.67,20.66 v1(26.75,21.74)
  BOTTOM w0.15: v1(15.68,12.99) 15.68,12.5 15.22,12.04 13.4,12.04 12.76,11.39 12.31,11.39 11.67,12.04 9.08,12.04 8.27,11.23 6.97,11.23 6.5,11.7 A1.8 ; v1(26.75,21.74) 25.9,20.89 U6.1
NINA_GREEN: length 48.9
  L2 w0.15: v1(7.21,11.68) 7.21,13.02 4.65,15.57 4.65,18.44 5.66,19.44 5.66,21.33 4.84,22.15 4.84,23.65 5.54,24.35 7.57,24.35 v1(8.46,25.24) 9.77,25.24 11.21,23.8 13.11,23.8 14.06,22.85 14.06,22.22 14.84,21.44 14.84,17.45 15.66,16.63 17.87,16.63 18.22,16.29 19.89,16.29 22.11,18.51 v1(22.9,18.51)
  BOTTOM w0.15: v1(22.9,18.51) 26.7,18.51 26.9,18.31 U6.6 ; J2.6 v1(8.46,25.24) ; A1.7 7.5,11.98 v1(7.21,11.68)
NINA_RED: length 29.2
  L2 w0.15: v1(27.73,21.73) 25.95,19.94 25.95,17.6 24.88,16.54 24.88,14.77 25.34,14.32 25.34,11.35 23.3,9.32 21.64,9.32 18.7,12.25 15.3,12.25 14.19,13.36 14.19,13.55 v1(13.78,13.96)
  BOTTOM w0.15: A1.1 13.5,13.68 v1(13.78,13.96) ; v1(27.73,21.73) 26.9,20.89 U6.3
NINA_SW2: length 44.3
  L2 w0.15: v1(23.25,13.02) 22.57,12.34 20.6,12.34 18.66,14.27 15.86,14.27 12.25,17.88 12.25,19.66 10.27,21.63 10.27,24.1 9.95,24.42 9.17,24.42 8.09,23.35 v1(6.5,23.35)
  BOTTOM w0.15: A1.18 6.5,21.86 6.97,22.33 6.97,22.88 v1(6.5,23.35) ; S2.3 S2.4 C7.2 28.4,6.98 27.65,7.72 25.29,7.72 23.46,9.55 23.46,12.8 v1(23.25,13.02)
NINA_SWCLK: length 17.5
  L2 w0.15: v1(5.04,14.11) 4.3,14.85 4.3,18.58 5.28,19.56 5.28,21.02 4.56,21.74 4.56,23.77 5.45,24.66 6.6,24.66 v1(7.19,25.24)
  BOTTOM w0.15: A1.11 4.57,14.57 v1(5.04,14.11) ; J2.4 v1(7.19,25.24)
NINA_SWDIO: length 9.9
  L2 w0.15: v1(4.82,20.05) 4.82,20.78 4.23,21.37 4.23,24.01 5.46,25.24 v1(5.92,25.24)
  BOTTOM w0.15: J2.2 v1(5.92,25.24) ; v1(4.82,20.05) 4.57,19.8 A1.15
RESET_N: length 39.6
  L2 w0.15: v1(4.5,4.3) 5.8,5.6 6.26,5.6 7.66,7 7.66,13.04 5.05,15.66 5.05,18.27 6.02,19.24 6.02,21.62 5.12,22.53 5.12,23.54 5.63,24.05 8.04,24.05 v1(8.4,24.41)
  BOTTOM w0.15: J2.10 10.98,27.61 10.98,26.03 10.7,25.75 10.2,25.75 8.86,24.41 v1(8.4,24.41) R16.2 ; TP9.1 4.95,4.75 v1(4.5,4.3) 3.85,4.95 C6.2 S1.3 S1.4
UART_CTS: length 23.1
  L2 w0.15: v1(9.68,22.91) 9.68,21.69 11.97,19.4 11.97,17.75 15.73,14 18.53,14 21.12,11.4 v1(21.68,11.4)
  BOTTOM w0.15: R7.2 21.68,11.07 v1(21.68,11.4) 22.44,11.4 TP5.1 ; v1(9.68,22.91) 9.68,22.33 9.5,22.14 A1.21
UART_RTS: length 25.8
  L2 w0.15: v1(8.5,22.65) 8.5,21.88 11.42,18.96 11.42,17.48 15.05,13.85 15.05,12.98 15.49,12.54 18.81,12.54 21.52,9.83 v1(21.89,9.83)
  BOTTOM w0.15: TP6.1 22.14,9.02 22.14,9.59 v1(21.89,9.83) 21.53,9.46 21.53,9.02 R8.2 ; A1.20 v1(8.5,22.65)
UART_RX: length 19.8
  L2 w0.15: v1(20.75,12.85) 19.03,14.57 15.95,14.57 12.53,18 12.53,19.91 11.5,20.94 v1(11.5,22.65)
  BOTTOM w0.15: R5.2 v1(20.75,12.85) 21.2,12.85 21.27,12.79 TP3.1 ; A1.23 v1(11.5,22.65)
UART_TX: length 28.1
  L2 w0.15: v1(9.68,23.97) 9.12,23.41 9.12,21.77 11.7,19.19 11.7,17.61 15.59,13.72 18.41,13.72 21.42,10.71 v1(22.39,10.71)
  BOTTOM w0.15: R6.2 21.43,9.87 21.43,10.31 21.82,10.71 v1(22.39,10.71) 22.64,10.71 22.79,10.56 TP4.1 ; A1.22 10.5,22.03 10.27,22.25 10.27,23.38 v1(9.68,23.97)
UNNAMED_1_APDS-9306_I175_SCL: length 3
  BOTTOM w0.15: R22.1 22.99,14.6 23.71,13.88 24.2,13.88 24.61,13.46 U3.1
UNNAMED_1_APDS-9306_I175_SDA: length 2.5
  BOTTOM w0.15: U3.2 25.26,13.86 24.15,14.97 R23.1
UNNAMED_1_BME280_I174_SCK: length 1.2
  BOTTOM w0.15: R15.1 19.85,33.27 20.02,33.09 U2.4
UNNAMED_1_BME280_I174_SDI: length 1.2
  BOTTOM w0.15: 20.68,32.73 20.68,33.38 20.8,33.51 R14.1
UNNAMED_1_FTDIFT234XD_I2_CTS: length 2.5
  BOTTOM w0.15: 17.62,8.82 18,8.82 18.59,8.24 R8.1
UNNAMED_1_FTDIFT234XD_I2_RTS: length 2.5
  BOTTOM w0.15: U5.8 18,10.18 18.34,10.51 19.15,10.51 19.52,10.14 R7.1
UNNAMED_1_FTDIFT234XD_I2_RXD: length 2.6
  BOTTOM w0.15: U5.10 18,9.27 18.51,8.77 19.43,8.77 R6.1
UNNAMED_1_FTDIFT234XD_I2_TXD: length 2.4
  BOTTOM w0.15: U5.7 17.79,10.62 18.26,11.09 R5.1
UNNAMED_1_NXP74LVC3G07_I5_1Y: length 8.5
  TOP w0.15: v1(26.4,18) 27.7,16.7 27.7,13.8 28.53,12.97 v1(28.53,11.93)
  BOTTOM w0.15: DS1.6 v1(28.53,11.93) ; U6.7 v1(26.4,18)
UNNAMED_1_NXP74LVC3G07_I5_2Y: length 5.6
  BOTTOM w0.15: DS1.5 28.23,12.6 28.63,13 28.63,15.14 27.4,16.37 U6.5
UNNAMED_1_NXP74LVC3G07_I5_3Y: length 7.8
  TOP w0.15: v1(28.16,14.05) 28.16,16.96 26.4,18.71 v1(26.4,19.51)
  BOTTOM w0.15: U6.2 v1(26.4,19.51) ; v1(28.16,14.05) 27.85,13.75 DS1.4
UNNAMED_1_RES_I28_A: length 0.9
  BOTTOM w0.15: R9.1 DS1.1
UNNAMED_1_RES_I29_A: length 2.3
  BOTTOM w0.15: DS1.2 26.86,12.6 26.5,12.97 26.5,13.8 26.85,14.15 R10.1
UNNAMED_1_RES_I30_A: length 1.4
  BOTTOM w0.15: R11.1 27.4,13.72 DS1.3
UNNAMED_1_RES_I33_A: length 1
  BOTTOM w0.15: U8.4 26.18,30.11 26.33,29.96 R13.1
UNNAMED_1_RES_I34_A: length 1
  BOTTOM w0.15: R12.1 26.33,32.34 26.18,32.19 U8.1
UNNAMED_1_RES_I81_A: length 2.3
  BOTTOM w0.15: A1.19 R16.1
USB_DM: length 3.3
  BOTTOM w0.15: 15.2,6.1 R2.1 16.09,5.91 16.09,5.6 15.54,5.06 15.54,4.71 15.45,4.63 15.45,3.98 J1.2
USB_DP: length 3.3
  BOTTOM w0.15: J1.3 15.89,3.98 15.89,4.67 15.81,4.75 15.81,4.94 16.36,5.49 16.36,5.92 R3.1 C5.2

## Copper pours and planes (outline as drawn; the poured copper is in the pictures)
GND on TOP (solid shape): 2.08,10.5 2.08,9.04 2.01,8.97 0.2,8.97 0.2,10.57 2.01,10.57
GND on TOP (solid shape): 25.58,2.01 25.58,0.2 23.98,0.2 23.98,2.01 24.05,2.08 25.51,2.08
GND on TOP (solid shape): 6.7,4.1 7.8,3.29 8.21,2 7.99,1.03 7.36,0.25 4.75,0.25 4.7,0.21 3.81,2.3 5.23,4.07 5.3,4 6.6,4
GND on BOTTOM (solid shape): 2.08,10.5 2.08,9.04 2.01,8.97 0.2,8.97 0.2,10.57 2.01,10.57
GND on BOTTOM (solid shape): 25.58,2.01 25.58,0.2 23.98,0.2 23.98,2.01 24.05,2.08 25.51,2.08
GND on BOTTOM (solid shape): 6.7,4.1 7.8,3.29 8.21,2 7.99,1.03 7.36,0.25 4.75,0.25 4.7,0.21 3.81,2.3 5.23,4.07 5.3,4 6.6,4
GND on TOP: 0.2,0.2 0.2,8.97 0.2,10.57 0.2,37.3 31.8,37.3 31.8,0.2 ; 1 cut-out
GND on BOTTOM: 0.2,0.2 0.2,37.3 31.8,37.3 31.8,0.2 ; 18 cut-outs
GND on L2: 0.2,0.2 31.8,0.2 31.8,37.3 0.2,37.3 ; 14 cut-outs
GND on L3: 0.2,0.2 31.8,0.2 31.8,37.3 0.2,37.3
GNDA on TOP, L2: 11.09,2.16 11.85,2.92 11.85,4.55 13.95,4.55 13.95,3.07 18.05,3.07 18.05,4.55 20.15,4.55 20.15,3.55 20.33,3.37 23.09,3.37 23.09,0.2 8.7,0.2 8.7,2.09 8.76,2.16
GNDA on BOTTOM, L3: 11.85,2.92 11.85,4.55 13.95,4.55 13.95,3.07 18.05,3.07 18.05,4.55 20.15,4.55 20.15,3.55 20.33,3.37 23.09,3.37 23.09,0.2 8.7,0.2 8.7,2.09 8.76,2.16 11.09,2.16
VBAT on TOP (solid shape): 2.08,7.96 2.08,6.5 2.01,6.43 0.2,6.43 0.2,8.03 2.01,8.03
VBAT on BOTTOM (solid shape): 2.08,7.96 2.08,6.5 2.01,6.43 0.2,6.43 0.2,8.03 2.01,8.03
VBAT on TOP: 9.69,4.12 9.04,4.77 3.96,4.77 2.77,5.96 0.2,5.96 0.2,8.47 5.75,8.47 7.17,7.05 11.24,7.05 11.88,7.69 11.88,9.69 12.93,10.73 18.16,10.73 18.23,10.66 18.23,4.81 18.18,4.75 11.84,4.75 11.22,4.12
VBAT on BOTTOM: 7.37,6.12 7.37,4.85 7.27,4.75 5.93,4.75 5.76,4.91 5.76,5.65 5.18,6.23 3.43,6.23 3.16,5.96 0.2,5.96 0.2,8.47 3.06,8.47 3.37,8.17 5.32,8.17 5.7,7.79 6.39,7.79 6.45,7.73 6.45,7.04
VBAT on L2: 0.94,8.47 6.38,8.47 6.92,7.93 6.92,6.67 6.18,5.92 0.95,5.92 0.71,6.17 0.71,8.24
VBUS on BOTTOM: 14.51,3.21 14.51,4.55 14.38,4.69 12.79,4.69 12.45,5.02 12.45,5.39 12.11,5.74 12.11,6.36 12.18,6.43 12.18,7.31 13.43,7.31 14.13,6.61 14.13,5.88 14.2,5.82 14.4,5.82 14.89,5.33 14.89,3.21
VBUS1 on BOTTOM: 8.68,10.12 9.53,10.12 9.96,10.56 9.96,10.75 10.39,11.18 11.64,11.18 11.95,10.86 13.31,10.86 14.33,9.84 15.09,9.84 15.11,9.82 15.11,9.63 15.08,9.61 13.51,9.61 13.25,9.87 10.52,9.87 9.52,8.88 9.52,7.6 9.81,7.31 11.78,7.31 11.78,6.65 11.65,6.52 10.28,6.52 9.84,6.08 9.84,5.45 9.15,4.75 7.6,4.75 7.53,4.82 7.53,6.05 8.38,6.91 8.38,9.83
VCC on TOP (solid shape): 28.12,2.01 28.12,0.2 26.52,0.2 26.52,2.01 26.59,2.08 28.05,2.08
VCC on BOTTOM (solid shape): 28.12,2.01 28.12,0.2 26.52,0.2 26.52,2.01 26.59,2.08 28.05,2.08
VCC on TOP: 26.04,0.2 26.04,9.63 24.78,10.9 12.88,10.9 11.74,9.76 11.74,7.72 11.17,7.15 7.29,7.15 5.43,9.02 5.43,12.01 6.87,13.46 22.06,13.46 23.25,14.65 23.25,22.58 23.75,23.08 25.42,23.08 25.93,22.57 25.93,17.82 26.25,17.5 26.53,17.5 27.93,16.1 27.93,5.45 27.93,5.46 27.93,3.87 28.59,3.21 28.59,0.2
VCC on BOTTOM: 28.59,0.2 28.59,2.96 27.59,3.96 27.59,5.41 26.9,6.1 26.18,6.1 25.8,5.73 25.8,3.55 26.05,3.3 26.05,0.2
VCC on BOTTOM: 26.02,17.48 26.02,16.64 25.63,16.25 25.63,15.17 25.85,14.96 26.17,14.96 26.53,15.32 26.53,15.68 26.78,15.93 27.32,15.93 27.55,15.7 27.55,14.88 27.54,14.88 26.68,14.88 26.48,14.68 26.48,14.27 26.11,13.9 26.11,12.8 26.1,12.79 25.72,12.79 25.71,12.79 25.71,13.81 24.94,14.58 24.94,16.8 25.62,17.48
VCC on BOTTOM: 17.39,15.2 18.19,15.2 18.19,12.74 18.02,12.57 16.61,12.57 16.46,12.71 16.46,13.92 16.59,14.04 17.17,14.04 17.39,14.26
VCC on BOTTOM: 11.42,8.93 11.28,9.07 9.9,9.07 9.67,8.84 9.67,7.67 9.87,7.47 11.24,7.47 11.42,7.65
VCC on BOTTOM: 4.15,13.52 4.15,12.09 4.66,11.59 4.66,11.11 5.4,11.11 5.49,11.02 5.49,8.56 5.85,8.2 6.51,8.2 6.78,7.93 6.78,6.97 6.95,6.8 8,6.8 8.22,7.02 8.22,9.05 7.02,10.25 7.02,10.77 5.85,11.95 5.85,13.52
VCC on BOTTOM: 4.4,32.83 6.38,32.83 6.42,32.79 6.42,30.03 4.32,30.03 4.22,30.13 4.22,32.65
VCC on L2: 28.55,1.03 28.55,4.37 28.1,4.82 26.17,4.82 25.88,4.52 25.88,3.37 26.1,3.15 26.1,0.94 26.28,0.76 28.29,0.76
VCC on L2: 23.05,19.6 22.58,20.06 22.58,26.51 21.57,27.52 18.53,27.52 16.25,25.24 12.21,25.24 8.95,28.5 5.76,28.5 4.25,30.01 4.25,31.88 4.54,32.18 5.2,32.18 5.45,31.92 5.45,30.46 6.49,29.42 9.52,29.42 12.47,26.47 15.54,26.47 20.68,31.61 20.68,33.8 21.32,34.45 22.02,34.45 22.58,33.89 22.58,32.86 23.46,31.98 23.46,29.71 23.48,29.34 23.82,29.16 24.54,28.44 24.54,19.85 24.28,19.6
FTDI_VCC on BOTTOM: 17.32,9.85 17.98,9.85 18.43,10.31 19.06,10.31 19.18,10.19 19.18,9.2 18.95,8.97 18.61,8.97 17.98,9.6 17.32,9.6
FTDI_VCC on BOTTOM: 14.52,9.4 15.09,9.4 15.12,9.38 15.12,8.74 15.08,8.7 14.01,8.7 13.45,8.13 11.94,8.13 11.82,8.25 11.82,8.94 12.04,9.16 12.04,9.48 12.29,9.73 13.18,9.73 13.52,9.39 14.52,9.39
FTDI_VCC on L2: 12.83,9.79 17.93,9.79 18.35,10.21 18.94,10.21 19.5,9.65 19.5,8.77 19.09,8.37 12.83,8.37 12.54,8.65 12.54,9.5
GPIO_16 on TOP (solid shape): 31.8,19.92 29.99,19.92 29.92,19.99 29.92,21.45 29.99,21.52 31.8,21.52
GPIO_16 on BOTTOM (solid shape): 31.8,19.92 29.99,19.92 29.92,19.99 29.92,21.45 29.99,21.52 31.8,21.52
GPIO_17 on TOP (solid shape): 31.8,22.46 29.99,22.46 29.92,22.53 29.92,23.99 29.99,24.06 31.8,24.06
GPIO_17 on BOTTOM (solid shape): 31.8,22.46 29.99,22.46 29.92,22.53 29.92,23.99 29.99,24.06 31.8,24.06
GPIO_27 on TOP (solid shape): 31.8,25 29.99,25 29.92,25.07 29.92,26.53 29.99,26.6 31.8,26.6
GPIO_27 on BOTTOM (solid shape): 31.8,25 29.99,25 29.92,25.07 29.92,26.53 29.99,26.6 31.8,26.6
GPIO_34 on TOP (solid shape): 31.8,12.3 29.99,12.3 29.92,12.37 29.92,13.83 29.99,13.9 31.8,13.9
GPIO_34 on BOTTOM (solid shape): 31.8,12.3 29.99,12.3 29.92,12.37 29.92,13.83 29.99,13.9 31.8,13.9
GPIO_35 on TOP (solid shape): 31.8,9.76 29.99,9.76 29.92,9.83 29.92,11.29 29.99,11.36 31.8,11.36
GPIO_35 on BOTTOM (solid shape): 31.8,9.76 29.99,9.76 29.92,9.83 29.92,11.29 29.99,11.36 31.8,11.36
GPIO_36 on TOP (solid shape): 31.8,7.22 29.99,7.22 29.92,7.29 29.92,8.75 29.99,8.82 31.8,8.82
GPIO_36 on BOTTOM (solid shape): 31.8,7.22 29.99,7.22 29.92,7.29 29.92,8.75 29.99,8.82 31.8,8.82
GPIO_37 on TOP (solid shape): 31.8,14.84 29.99,14.84 29.92,14.91 29.92,16.37 29.99,16.44 31.8,16.44
GPIO_37 on BOTTOM (solid shape): 31.8,14.84 29.99,14.84 29.92,14.91 29.92,16.37 29.99,16.44 31.8,16.44
GPIO_38 on TOP (solid shape): 31.8,17.38 29.99,17.38 29.92,17.45 29.92,18.91 29.99,18.98 31.8,18.98
GPIO_38 on BOTTOM (solid shape): 31.8,17.38 29.99,17.38 29.92,17.45 29.92,18.91 29.99,18.98 31.8,18.98
GPIO_48_D1 on TOP (solid shape): 2.08,27.51 2.08,26.05 2.01,25.98 0.2,25.98 0.2,27.58 2.01,27.58
GPIO_48_D1 on BOTTOM (solid shape): 2.08,27.51 2.08,26.05 2.01,25.98 0.2,25.98 0.2,27.58 2.01,27.58
GPIO_50_D0 on TOP (solid shape): 2.08,30.05 2.08,28.59 2.01,28.52 0.2,28.52 0.2,30.12 2.01,30.12
GPIO_50_D0 on BOTTOM (solid shape): 2.08,30.05 2.08,28.59 2.01,28.52 0.2,28.52 0.2,30.12 2.01,30.12
GPIO_51_CS on TOP (solid shape): 2.08,32.59 2.08,31.13 2.01,31.06 0.2,31.06 0.2,32.66 2.01,32.66
GPIO_51_CS on BOTTOM (solid shape): 2.08,32.59 2.08,31.13 2.01,31.06 0.2,31.06 0.2,32.66 2.01,32.66
GPIO_52_CLK on TOP (solid shape): 2.08,24.97 2.08,23.51 2.01,23.44 0.2,23.44 0.2,25.04 2.01,25.04
GPIO_52_CLK on BOTTOM (solid shape): 2.08,24.97 2.08,23.51 2.01,23.44 0.2,23.44 0.2,25.04 2.01,25.04
I2C_SCL on TOP (solid shape): 31.8,30.08 29.99,30.08 29.92,30.15 29.92,31.61 29.99,31.68 31.8,31.68
I2C_SCL on BOTTOM (solid shape): 31.8,30.08 29.99,30.08 29.92,30.15 29.92,31.61 29.99,31.68 31.8,31.68
I2C_SCL on BOTTOM (solid shape): 30.05,30.88 29.23,30.14 28.54,30.83 28.52,30.88 28.54,30.93 29.23,31.62
I2C_SDA on TOP (solid shape): 31.8,27.54 29.99,27.54 29.92,27.61 29.92,29.07 29.99,29.14 31.8,29.14
I2C_SDA on BOTTOM (solid shape): 31.8,27.54 29.99,27.54 29.92,27.61 29.92,29.07 29.99,29.14 31.8,29.14
GND on TOP (solid shape): 31.31,37.31 31.58,37.08 31.81,36.81 31.81,34.19 29.77,33.27 27.96,34.58 28.1,34.72 28.1,36.11 27.91,36.3 28.23,36.86 28.69,37.31
GND on TOP (solid shape): 3.31,37.31 3.99,36.52 4.24,35.5 2.7,33.38 0.2,34.17 0.2,36.8 0.19,36.81 0.42,37.08 0.69,37.31
GND on BOTTOM (solid shape): 0.81,1.82 0.9,1.85 0.99,1.82 1.45,1.3 0.9,0.81 0.35,1.3
GND on BOTTOM (solid shape): 1.45,4.5 0.99,3.98 0.9,3.95 0.81,3.98 0.35,4.5 0.9,4.99
GND on BOTTOM (solid shape): 31.01,1.82 31.1,1.85 31.19,1.82 31.65,1.3 31.1,0.81 30.55,1.3
GND on BOTTOM (solid shape): 31.65,4.5 31.19,3.98 31.1,3.95 31.01,3.98 30.55,4.5 31.1,4.99
GND on BOTTOM (solid shape): 31.3,37.3 31.57,37.07 31.79,36.8 31.79,34.2 28.43,33.93 28.7,37.3
GND on BOTTOM (solid shape): 3.3,37.3 3.97,36.51 4.21,35.5 2.72,33.41 0.25,34.14 0.25,36.75 0.21,36.8 0.43,37.07 0.7,37.3
GPIO_16 on L2 (solid shape): 30.05,20.72 29.46,20.16 28.95,20.67 28.93,20.72 28.95,20.77 29.46,21.28
GPIO_17 on L2 (solid shape): 30.05,23.26 29.46,22.7 28.95,23.21 28.93,23.26 28.95,23.31 29.46,23.82
GPIO_27 on L2 (solid shape): 30.05,25.8 29.46,25.24 28.95,25.75 28.93,25.8 28.95,25.85 29.46,26.36
GPIO_35 on L2 (solid shape): 30.05,10.56 29.47,10.02 28.97,10.51 28.95,10.56 28.97,10.61 29.47,11.1
GPIO_37 on L2 (solid shape): 30.05,15.64 29.46,15.08 28.95,15.59 28.93,15.64 28.95,15.69 29.46,16.2
GPIO_38 on L2 (solid shape): 30.05,18.18 29.5,17.65 29.02,18.13 29,18.18 29.02,18.23 29.5,18.71
GPIO_48_D1 on L2 (solid shape): 3.05,26.83 3.07,26.78 3.05,26.73 2.54,26.22 1.95,26.78 2.54,27.34
I2C_SDA on BOTTOM (solid shape): 30.05,28.34 29.46,27.78 28.95,28.29 28.93,28.34 28.95,28.39 29.46,28.9
NINA_SW2 on BOTTOM (solid shape): 29.45,1.83 29.5,1.85 29.55,1.83 30.05,1.3 29.5,0.83 28.95,1.3
NINA_SW2 on BOTTOM (solid shape): 30.05,4.5 29.55,3.97 29.5,3.95 29.45,3.97 28.95,4.5 29.5,4.97
RESET_N on BOTTOM (solid shape): 2.45,1.83 2.5,1.85 2.55,1.83 3.05,1.3 2.5,0.83 1.95,1.3
RESET_N on BOTTOM (solid shape): 3.05,4.5 2.55,3.97 2.5,3.95 2.45,3.97 1.95,4.5 2.5,4.97

Small or netless copper shapes (teardrops, artwork), in the pictures only: 4 on TOP, 267 on BOTTOM, 66 on L2, 3 on L3

## Text on the board
Ref Des/Silkscreen Bottom: J5 | S1 | D1 | D0 | CS | J3 | CLK | 1 | TP9 | RESET | C14 | S | R19 | D | G | Q1 | J2 | TP1 | U5 | 36 | U9 | REV. A | 35 | UBXH60-0000622 | 34 | RX | J1 | TX | 37 | U2 | RTS | CTS | J4 | 38 | TP3 | TP5 | TP6 | TP4 | 16 | U3 | U8 | GND | I2C_SDA | 17 | TP7 | VCC | 27 | GPIO PINS | TP8 | J7 | J6 | S2 | I2C_SCL | VBAT | TP2 | TP10 | RGB LED | C209
Board Geometry/Soldermask Top: GND
